# EAGLE board Fonte_de_tensao (EAGLE 9.6.2)
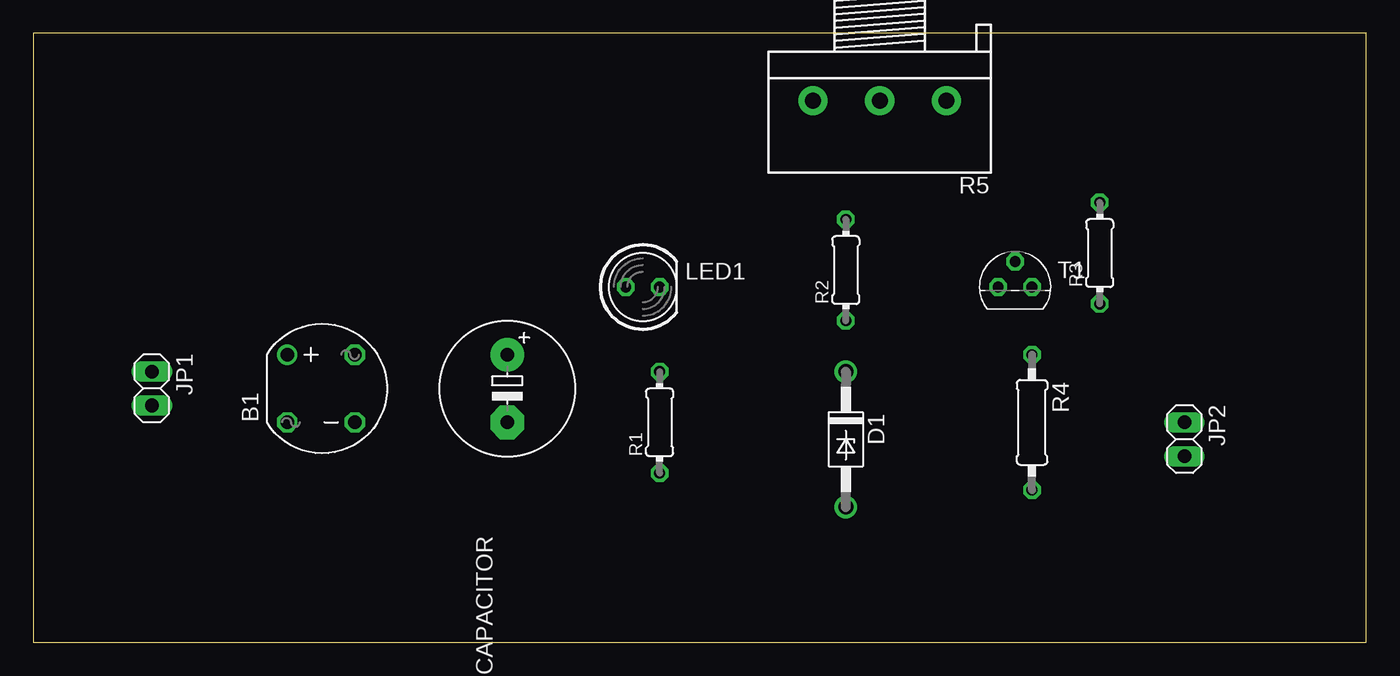
[diagram p0: board, top side]
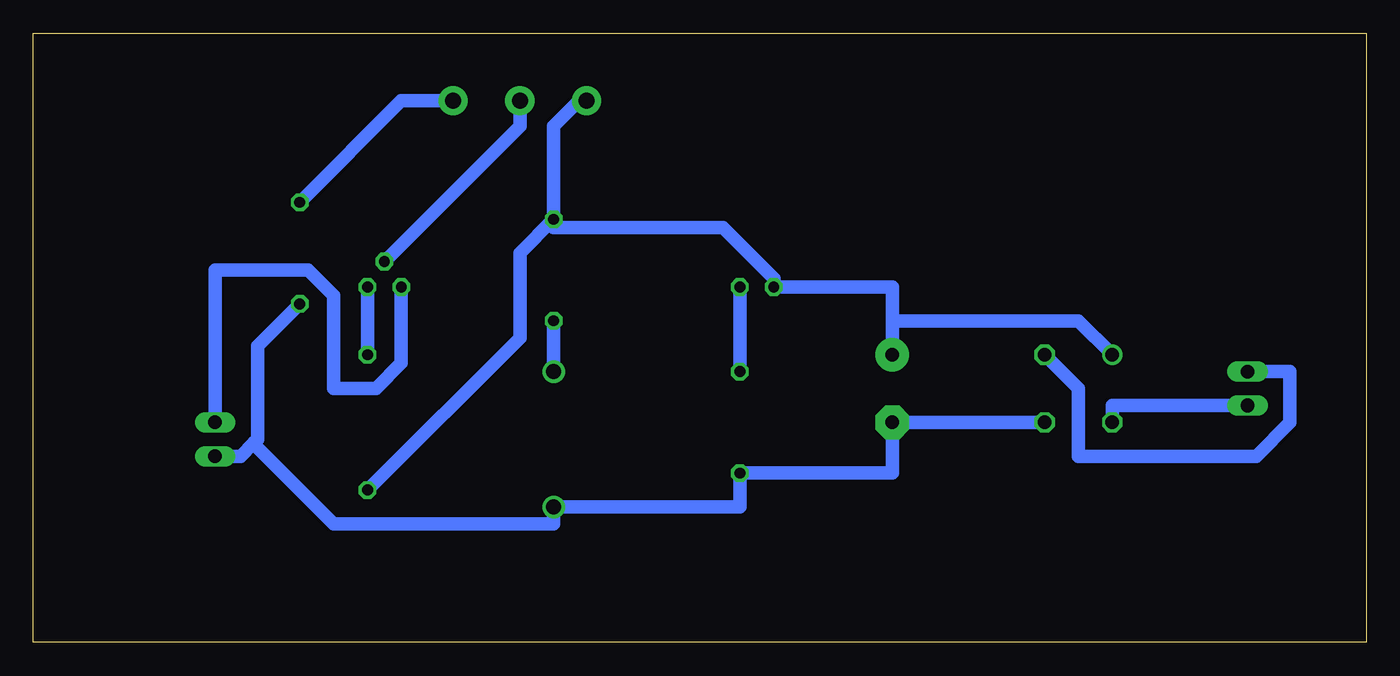
[diagram p1: board, bottom side, seen from below]

Size 100 x 45.71 mm. Coordinates in mm from the lower left corner, seen from the top.
Outline: 0,0 100,0 100,45.71 0,45.71 0,0
Copper layers (1*16): Top 0.035mm / dielectric 1.5mm / Bottom 0.035mm
Design rules "default *": minimum track width 40mil, minimum drill 0.35mm, track to track 40mil, track to pad 40mil, pad to pad 40mil, via to via 40mil, smd to smd 40mil, copper to edge 40mil, drill to drill 6mil, minimum pad ring 10mil, minimum via ring 8mil, stop-mask expansion 4mil, vias tented up to drill 0mil, thermal gap 10mil

## Footprints (pad centres in the part's own frame; a part is rotated, then mirrored left to right if it is on the bottom)
RB1A = drill 1.016: + -2.54,2.54 | drill 1.016 octagon: - 2.54,-2.54; AC1 2.54,2.54; AC2 -2.54,-2.54
E5-10,5 = drill 1.016 pad 2.54: + -2.54,0 | drill 1.016 pad 2.54 octagon: - 2.54,0
DO41Z10 = drill 1.118: A 5.08,0; C -5.08,0
1X02 = drill 1.016 long: 1 -1.27,0; 2 1.27,0
LED5MM = drill 0.813 octagon: A -1.27,0; K 1.27,0
0204/7 = drill 0.813 octagon: 1 -3.81,0; 2 3.81,0
0207/10 = drill 0.813 octagon: 1 -5.08,0; 2 5.08,0
3RP/1610N = drill 1.2 pad 2.184: 1 -5,0; 2 0,0; 3 5,0
TO92 = drill 0.813 octagon: 1 1.27,0; 2 0,1.905; 3 -1.27,0

## Placement (x,y rotation side)
B1  Ponte  [RB1A]  21.59,19.05 0 top
CAPACITOR  470uF x 50V  [E5-10,5]  35.56,19.05 270 top
D1  1N4728  [DO41Z10]  60.96,15.24 270 top
JP1  Transformador  [1X02]  8.89,19.05 270 top
JP2  Saida  [1X02]  86.36,15.24 270 top
LED1  Led_Blue  [LED5MM]  45.72,26.67 0 top
R1  6k8  [0204/7]  46.99,16.51 90 top
R2  1k5  [0204/7]  60.96,27.94 90 top
R3  4k7  [0204/7]  80.01,29.21 90 top
R4  100  [0207/10]  74.93,16.51 270 top
R5  10k  [3RP/1610N]  63.5,40.64 180 top
T1  2N3904  [TO92]  73.66,26.67 0 top

## Library data of the parts
B1 = rectifier
CAPACITOR = rcl; SPICEPREFIX: C
D1 = diode
JP1 JP2 = pinhead
LED1 = led
R1-R4 = rcl; SPICEPREFIX: R
R5 = pot
T1 = transistor

## Nets
N$1: B1.AC2 JP1.2
N$4: B1.+ CAPACITOR.+ LED1.A R2.2 R4.2 R5.3
N$5: LED1.K R1.2
N$6: D1.C R2.1
N$7: R3.2 R5.1
N$8: R5.2 T1.2
N$9: JP2.1 T1.3
N$10: R4.1 T1.1
SAIDA: B1.- CAPACITOR.- D1.A JP2.2 R1.1 R3.1
TRANSFORMADOR: B1.AC1 JP1.1

## Tracks (layer width: path | path; a pad name or v marks a point on that pad's centre or on a via)
N$1
  Bottom 1.016: JP1.2 19.05,17.78 B1.AC2
N$4
  Bottom 1.016: CAPACITOR.+ 35.56,24.13 | 35.56,24.13 35.56,26.67 LED1.A 44.45,27.3 48.26,31.12 60.96,31.12 R2.2 | B1.+ 21.59,24.13 35.56,24.13 | R4.2 63.5,22.86 63.5,29.21 R2.2 | R2.2 60.96,38.74 59.05,40.64 R5.3
N$5
  Bottom 1.016: LED1.K R1.2
N$6
  Bottom 1.016: D1.C R2.1
N$7
  Bottom 1.016: R3.2 72.39,40.64 R5.1
N$8
  Bottom 1.016: T1.2 63.5,38.74 R5.2
N$9
  Bottom 1.016: T1.3 72.39,20.95 74.3,19.05 77.47,19.05 77.47,26.04 79.38,27.94 86.36,27.94 JP2.1
N$10
  Bottom 1.016: T1.1 R4.1
SAIDA
  Bottom 1.016: R3.1 83.19,22.23 83.19,15.24 83.5,14.92 | 83.5,14.92 84.45,13.97 JP2.2 | B1.- CAPACITOR.- 35.56,12.7 R1.1 46.99,10.16 D1.A 60.96,8.89 77.47,8.89 83.5,14.92
TRANSFORMADOR
  Bottom 1.016: JP1.1 5.71,20.32 5.71,16.51 8.26,13.97 21.59,13.97 21.59,19.05 B1.AC1